# Altium PCB Avalon_ctrlunit.PcbDoc (part 3 of 6)
Units mil, origin at the board's own origin, x right, y up, seen from the top; angles counter-clockwise.
Board outline 3947.62 x 3160.22 mil, 4 copper layers (Top Layer, Mid-Layer 1, Mid-Layer 2, Bottom Layer); 194 components, 260 nets, 936 pads, 465 vias.
Unrouted connection lines stored in the file: 1.
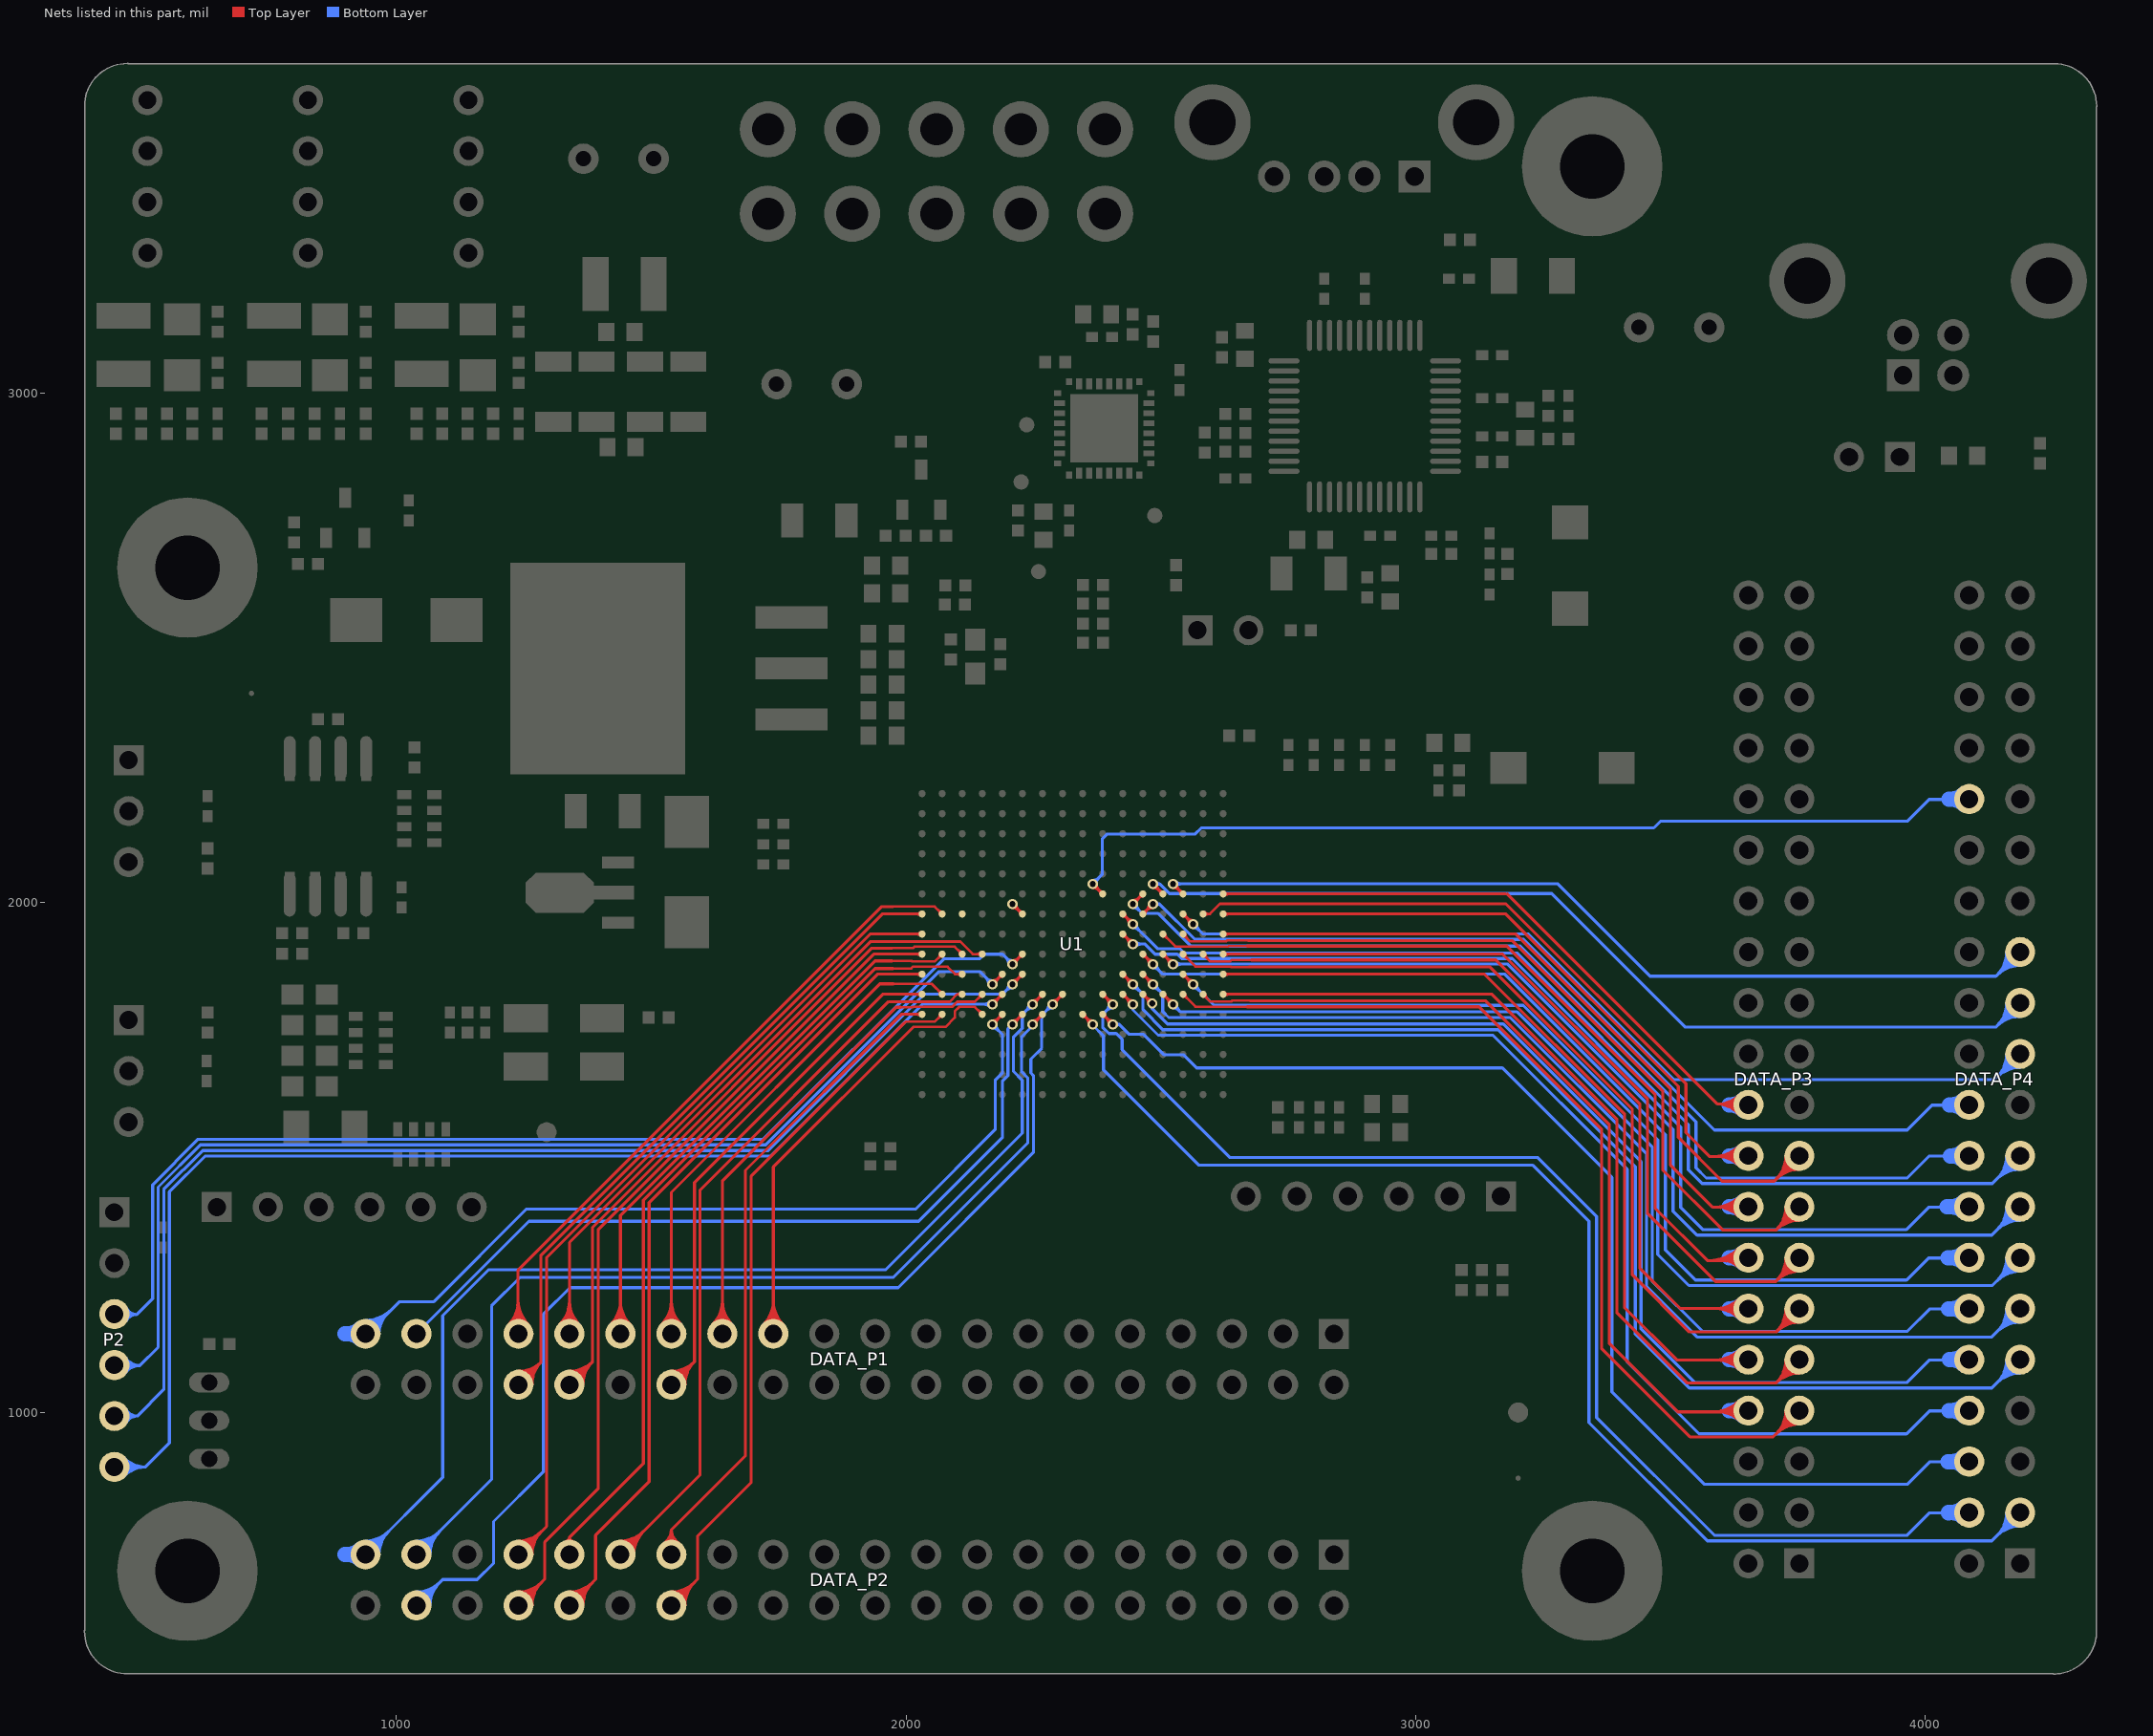
[diagram p5: the nets of this part, all layers, seen from the top]

## Via types
v1: diameter 20, hole 12, Top Layer to Bottom Layer, tented both sides, 334 vias
v2: diameter 32, hole 18, Top Layer to Bottom Layer, tented both sides, 84 vias
v3: diameter 50, hole 28, Top Layer to Bottom Layer, 32 vias
v4: diameter 25.98, hole 12.99, Top Layer to Bottom Layer, tented both sides, 9 vias
v5: diameter 50, hole 28, Top Layer to Bottom Layer, tented both sides, 6 vias

## Nets (pads, with @x,y where several pads share a name; then routed paths per layer and width w, separated by ;. In a path a pad name is that pad's centre, name@x,y a point inside that pad or via, vN(x,y) a via of type N, cw(c..) or ccw(c..) an arc to the next point about the centre after c; other vN are vias at no path point) (continued)
FPGA_E7: DATA_P4.6 U1.E7 | length 2459.6
  Top Layer w6: U1.E7@2386.06,1777.2 cw(c2386.06,1767.55) 2392.88,1774.38 cw(c2399.71,1781.2) U1.E7@2390.06,1781.2 ; U1.E7@2386.06,1781.2 v1(2405.74,1761.52) ; v1@2398.74,1761.52 ccw(c2381.84,1761.52) 2393.79,1773.47 ccw(c2405.74,1785.42) v1@2405.74,1768.52
  Bottom Layer w6: v1(2405.74,1761.52) 2418.48,1761.52 ; v1@2411.65,1757.77 cw(c2418.48,1753.43) 2418.48,1761.52 ; v1@2411.65,1765.27 ccw(c2418.48,1769.61) 2418.48,1761.52 ; 4044,903 4008,903 3964,859 3566.56,859 3385,1040.56 3385,1461 3170,1676 2570,1676 2544,1702 2506,1702 2466,1742 2438,1742 2418.48,1761.52
  Bottom Layer w30: 4044,903 4044.54,903.54 DATA_P4.6@4085.86,903.54 ; DATA_P4.6@4075.59,893.27 ccw(c4050.79,868.47) 4050.79,903.54 ccw(c4050.79,938.62) DATA_P4.6@4075.59,913.82
FPGA_E8: DATA_P4.3 U1.E8 | length 2836.6
  Top Layer w6: U1.E8@2346.68,1777.2 cw(c2346.68,1767.55) 2353.51,1774.38 cw(c2360.34,1781.2) U1.E8@2350.68,1781.2 ; U1.E8@2346.68,1781.2 v1(2366.37,1761.52) ; v1@2359.37,1761.52 ccw(c2342.47,1761.52) 2354.42,1773.47 ccw(c2366.37,1785.42) v1@2366.37,1768.52
  Bottom Layer w6: v1(2366.37,1761.52) 2366.37,1759.88 2387.74,1738.51 2387.69,1738.45 2387.69,1672.31 2575,1485 3230,1485 3340,1375 3340,980 3572,748 4130.31,748 DATA_P4.3@4185.86,803.54 ; DATA_P4.3@4159.33,803.54 cw(c4095.29,803.54) 4140.57,758.26 cw(c4185.86,712.97) DATA_P4.3@4185.86,777.02 ; DATA_P4.3@4165.33,803.54 cw(c4115.77,803.54) 4150.82,768.5 cw(c4185.86,733.46) DATA_P4.3@4185.86,783.02 ; DATA_P4.3@4171.33,803.54 cw(c4136.26,803.54) 4161.06,778.74 cw(c4185.86,753.94) DATA_P4.3@4185.86,789.02
FPGA_E10: DATA_P2.37 U1.E10 | length 2282.6
  Top Layer w6: v1(2248.26,1761.52) U1.E10@2267.94,1781.2 ; v1@2248.26,1768.52 ccw(c2248.26,1785.42) 2260.21,1773.47 ccw(c2272.16,1761.52) v1@2255.26,1761.52 ; U1.E10@2263.94,1781.2 cw(c2254.29,1781.2) 2261.12,1774.38 cw(c2267.94,1767.55) U1.E10@2267.94,1777.2
  Bottom Layer w6: DATA_P2.37@1039.76,721.29 1187,868.53 1187,1209 1243,1265 1975,1265 2239,1529 2239,1656.56 2227,1668.56 2227,1737.44 2248.26,1758.7 v1(2248.26,1761.52) ; DATA_P2.37@1039.76,735.82 ccw(c1039.76,770.89) 1064.56,746.09 ccw(c1089.36,721.29) DATA_P2.37@1054.29,721.29 ; DATA_P2.37@1039.76,741.82 ccw(c1039.76,791.38) 1074.81,756.33 ccw(c1109.85,721.29) DATA_P2.37@1060.29,721.29 ; DATA_P2.37@1039.76,747.82 ccw(c1039.76,811.86) 1085.05,766.58 ccw(c1130.33,721.29) DATA_P2.37@1066.29,721.29
FPGA_E11: DATA_P1.37 U1.E11 | length 1608.9
  Top Layer w6: v1(2208.89,1761.52) U1.E11@2228.57,1781.2 ; v1@2208.89,1768.52 ccw(c2208.89,1785.42) 2220.84,1773.47 ccw(c2232.79,1761.52) v1@2215.89,1761.52 ; U1.E11@2224.57,1781.2 cw(c2214.92,1781.2) 2221.75,1774.38 cw(c2228.57,1767.55) U1.E11@2228.57,1777.2
  Bottom Layer w6: DATA_P1.37@1039.76,1154.36 1260.4,1375 2025,1375 2189,1539 2189,1650 2200,1661 2200,1752.63 v1(2208.89,1761.52)
FPGA_E12: DATA_P1.39 U1.E12 | length 2025.3
  Top Layer w6: v1(2169.52,1761.52) U1.E12@2189.2,1781.2 ; v1@2169.52,1768.52 ccw(c2169.52,1785.42) 2181.47,1773.47 ccw(c2193.42,1761.52) v1@2176.52,1761.52 ; U1.E12@2185.2,1781.2 cw(c2175.55,1781.2) 2182.38,1774.38 cw(c2189.2,1767.55) U1.E12@2189.2,1777.2
  Bottom Layer w6: DATA_P1.39@939.76,1168.89 ccw(c939.76,1212.65) 970.71,1181.71 ; DATA_P1.39@939.76,1174.89 ccw(c939.76,1233.13) 980.95,1191.95 ; DATA_P1.39@939.76,1180.89 ccw(c939.76,1253.62) 991.19,1202.19 ; DATA_P1.39@941.56,1152.56 1006,1217 1073,1217 1255,1399 2019,1399 2175,1555 2175,1651.56 2189,1665.56 2189,1742.04 v1(2169.52,1761.52) ; DATA_P1.39@960.29,1154.36 cw(c1001.16,1154.36) 972.26,1183.26 ; DATA_P1.39@966.29,1154.36 cw(c1021.65,1154.36) 982.5,1193.5 ; v1@2169.52,1754.52 cw(c2169.52,1737.62) 2181.47,1749.57 cw(c2193.42,1761.52) v1@2176.52,1761.52
  Bottom Layer w30: 899,1154.36 DATA_P1.39@939.76,1154.36 ; DATA_P1.39@929.49,1144.09 ccw(c904.69,1119.29) 904.69,1154.36 ccw(c904.69,1189.43) DATA_P1.39@929.49,1164.63
FPGA_E13: DATA_P1.23 U1.E13 | length 1131.3
  Top Layer w5: 2013,1755 2014.33,1756.33 2077.33,1756.33 2095.96,1774.96 2095.96,1787.21 2104.46,1795.7 2135.33,1795.7 U1.E13@2149.83,1781.2 ; U1.E13@2145.33,1781.2 ccw(c2134.47,1781.2) 2142.15,1788.89 ccw(c2149.83,1796.57) U1.E13@2149.83,1785.7
  Top Layer w6: DATA_P1.23@1721.01,1173.12 ccw(c1675.72,1218.41) 1739.76,1218.41 ccw(c1803.81,1218.41) DATA_P1.23@1758.52,1173.12 ; DATA_P1.23@1725.25,1168.88 ccw(c1690.21,1203.92) 1739.76,1203.92 ccw(c1789.32,1203.92) DATA_P1.23@1754.28,1168.88 ; DATA_P1.23@1729.49,1164.63 ccw(c1704.69,1189.43) 1739.76,1189.43 ccw(c1774.84,1189.43) DATA_P1.23@1750.04,1164.63 ; DATA_P1.23@1739.76,1154.36 1739.76,1481.76 2013,1755
FPGA_E15: DATA_P2.28 U1.E15 | length 1663.9
  Top Layer w5: 1997,1764 1999.7,1766.7 2056.59,1766.7 U1.E15@2071.09,1781.2 ; U1.E15@2066.59,1781.2 cw(c2055.73,1781.2) 2063.41,1773.52 cw(c2071.09,1765.84) U1.E15@2071.09,1776.7
  Top Layer w6: DATA_P2.28@1539.76,621.29 1591,672.53 1591,757 1696,862 1696,1463 1997,1764 ; DATA_P2.28@1539.76,635.82 ccw(c1539.76,670.89) 1564.56,646.09 ccw(c1589.36,621.29) DATA_P2.28@1554.29,621.29 ; DATA_P2.28@1539.76,641.82 ccw(c1539.76,691.38) 1574.81,656.33 ccw(c1609.85,621.29) DATA_P2.28@1560.29,621.29 ; DATA_P2.28@1539.76,647.82 ccw(c1539.76,711.86) 1585.05,666.58 ccw(c1630.33,621.29) DATA_P2.28@1566.29,621.29
FPGA_E16: DATA_P2.27 U1.E16 | length 1412.8
  Top Layer w6: DATA_P2.27@1525.46,743.64 ccw(c1508.75,769.76) 1539.76,769.76 ; DATA_P2.27@1528.7,738.58 ccw(c1515.76,758.8) 1539.76,758.8 ccw(c1563.77,758.8) DATA_P2.27@1550.83,738.58 ; DATA_P2.27@1539.76,721.29 1539.76,769.76 ; DATA_P2.27@1554.06,743.64 cw(c1570.78,769.76) 1539.76,769.76 ; U1.E16@2028.9,1778.38 ccw(c2022.07,1771.55) 2022.07,1781.2 ccw(c2022.07,1790.86) U1.E16@2028.9,1784.03 ; U1.E16@2031.72,1781.2 1991.2,1781.2 1685,1475 1685,915 1539.76,769.76
FPGA_F1: DATA_P3.9 U1.F1 | length 1936.5
  Top Layer w6: U1.F1@2622.28,1820.57 3149.43,1820.57 3395,1575 3395,1195 3532,1058 3707.24,1058 DATA_P3.9@3752.79,1103.54 ; U1.F1@2625.1,1817.75 cw(c2631.93,1810.92) 2631.93,1820.57 cw(c2631.93,1830.23) U1.F1@2625.1,1823.4 ; DATA_P3.9@3726.26,1103.54 cw(c3662.22,1103.54) 3707.5,1058.26 cw(c3752.79,1012.97) DATA_P3.9@3752.79,1077.02 ; DATA_P3.9@3732.26,1103.54 cw(c3682.7,1103.54) 3717.74,1068.5 cw(c3752.79,1033.46) DATA_P3.9@3752.79,1083.02 ; DATA_P3.9@3738.26,1103.54 cw(c3703.19,1103.54) 3727.99,1078.74 cw(c3752.79,1053.94) DATA_P3.9@3752.79,1089.02
FPGA_F2: DATA_P3.8 U1.F2 | length 1985.5
  Top Layer w5: U1.F2@2582.91,1816.07 cw(c2582.91,1805.21) 2590.59,1812.89 cw(c2598.27,1820.57) U1.F2@2587.41,1820.57 ; U1.F2@2582.91,1820.57 2597.41,1806.07 2638.07,1806.07 2640,1808 2675.22,1808
  Top Layer w6: 2675.22,1808 3136.78,1808 3380,1564.78 3380,1135 3514,1001 DATA_P3.8@3652.79,1001 ; 3582.6,1001 ccw(c3582.6,1073.73) DATA_P3.8@3634.03,1022.3 ; 3594.88,1001 cw(c3594.88,945.64) DATA_P3.8@3634.03,984.79 ; 3597.09,1001 ccw(c3597.09,1059.24) DATA_P3.8@3638.27,1018.06 ; 3609.37,1001 cw(c3609.37,960.13) DATA_P3.8@3638.27,989.03 ; 3611.57,1001 ccw(c3611.57,1044.76) DATA_P3.8@3642.51,1013.82
  Bottom Layer w30: 3615,1003.54 DATA_P3.8@3652.79,1003.54 ; DATA_P3.8@3642.51,993.27 ccw(c3617.71,968.47) 3617.71,1003.54 ccw(c3617.71,1038.62) DATA_P3.8@3642.51,1013.82
FPGA_F3: DATA_P3.7 U1.F3 | length 2092.9
  Top Layer w5: U1.F3@2543.54,1816.07 cw(c2543.54,1805.21) 2551.22,1812.89 cw(c2558.9,1820.57) U1.F3@2548.04,1820.57 ; U1.F3@2543.54,1820.57 2568.04,1796.07 2632.42,1796.07 2632.5,1796 2669,1796
  Top Layer w6: 2669,1796 3124,1796 3365,1555 3365,1125 3538,952 3701.24,952 DATA_P3.7@3752.79,1003.54 ; DATA_P3.7@3726.26,1003.54 cw(c3662.22,1003.54) 3707.5,958.26 cw(c3752.79,912.97) DATA_P3.7@3752.79,977.02 ; DATA_P3.7@3732.26,1003.54 cw(c3682.7,1003.54) 3717.74,968.5 cw(c3752.79,933.46) DATA_P3.7@3752.79,983.02 ; DATA_P3.7@3738.26,1003.54 cw(c3703.19,1003.54) 3727.99,978.74 cw(c3752.79,953.94) DATA_P3.7@3752.79,989.02
FPGA_F4: DATA_P4.12 U1.F4 | length 2150.8
  Top Layer w6: U1.F4@2504.17,1816.57 cw(c2504.17,1806.92) 2510.99,1813.75 cw(c2517.82,1820.57) U1.F4@2508.17,1820.57 ; U1.F4@2504.17,1820.57 v1(2523.85,1800.89) ; v1@2516.85,1800.89 ccw(c2499.95,1800.89) 2511.9,1812.84 ccw(c2523.85,1824.79) v1@2523.85,1807.89
  Bottom Layer w6: v1@2523.85,1793.89 cw(c2523.85,1776.99) 2535.8,1788.94 cw(c2547.75,1800.89) v1@2530.85,1800.89 ; v1(2523.85,1800.89) 2538.74,1786 3199,1786 3464,1521 3464,1258 3563,1159 3964,1159 4008,1203 4045,1203
  Bottom Layer w30: 4045.54,1203.54 DATA_P4.12@4085.86,1203.54 ; DATA_P4.12@4075.59,1193.27 ccw(c4050.79,1168.47) 4050.79,1203.54 ccw(c4050.79,1238.62) DATA_P4.12@4075.59,1213.82
FPGA_F5: DATA_P4.10 U1.F5 | length 2253.4
  Top Layer w6: U1.F5@2463.28,1822.09 U1.F5@2464.8,1820.57 v1(2482.96,1802.41) v1@2484.79,1800.58 ; U1.F5@2464.8,1816.57 cw(c2464.8,1806.92) 2471.62,1813.75 cw(c2478.45,1820.57) U1.F5@2468.8,1820.57 ; v1@2475.96,1802.41 ccw(c2459.06,1802.41) 2471.01,1814.36 ccw(c2482.96,1826.31) v1@2482.96,1809.41
  Bottom Layer w6: v1@2480.35,1795.91 cw(c2478.78,1792.04) 2482.96,1792.04 ; v1(2482.96,1802.41) 2482.96,1792.04 ; v1@2485.58,1795.91 ccw(c2487.14,1792.04) 2482.96,1792.04 ; 4036,1103 4008,1103 3964,1059 3547,1059 3442,1164 3442,1492 3171.85,1762.15 2512.85,1762.15 2482.96,1792.04
  Bottom Layer w30: 4047,1104 DATA_P4.10@4085.86,1103.54 ; DATA_P4.10@4075.47,1093.39 ccw(c4050.38,1068.89) 4050.79,1103.96 ccw(c4051.2,1139.03) DATA_P4.10@4075.71,1113.94
FPGA_F6: DATA_P4.8 U1.F6 | length 2375.5
  Top Layer w6: U1.F6@2425.43,1816.57 cw(c2425.43,1806.92) 2432.25,1813.75 cw(c2439.08,1820.57) U1.F6@2429.43,1820.57 ; U1.F6@2425.43,1820.57 v1(2445.11,1800.89) v1@2446.94,1799.06 ; v1@2438.11,1800.89 ccw(c2421.21,1800.89) 2433.16,1812.84 ccw(c2445.11,1824.79) v1@2445.11,1807.89
  Bottom Layer w6: v1@2442.15,1794.55 cw(c2439.97,1789.89) 2445.11,1789.89 ; v1(2445.11,1800.89) 2445.11,1789.89 ; v1@2448.07,1794.55 ccw(c2450.25,1789.89) 2445.11,1789.89 ; 4046,1003 4008,1003 3963,958 3556,958 3415,1099 3415,1477 3151.85,1740.15 2494.85,1740.15 2445.11,1789.89
  Bottom Layer w30: 4046,1003 4046.54,1003.54 DATA_P4.8@4085.86,1003.54 ; DATA_P4.8@4075.59,993.27 ccw(c4050.79,968.47) 4050.79,1003.54 ccw(c4050.79,1038.62) DATA_P4.8@4075.59,1013.82
FPGA_F7: DATA_P4.4 U1.F7 | length 2578.4
  Top Layer w6: U1.F7@2386.06,1816.57 cw(c2386.06,1806.92) 2392.88,1813.75 cw(c2399.71,1820.57) U1.F7@2390.06,1820.57 ; U1.F7@2386.06,1820.57 v1(2405.74,1800.89) ; v1@2398.74,1800.89 ccw(c2381.84,1800.89) 2393.79,1812.84 ccw(c2405.74,1824.79) v1@2405.74,1807.89
  Bottom Layer w6: v1@2398.74,1800.89 cw(c2381.84,1800.89) 2393.79,1788.94 cw(c2405.74,1776.99) v1@2405.74,1793.89 ; v1(2405.74,1800.89) 2386,1781.15 2386,1755.8 2398.28,1743.52 2412.48,1743.52 2424,1732 2424,1712 2636,1500 3239.44,1500 3355,1384.44 3355,990 3586,759 3964,759 4008,803 4045,803
  Bottom Layer w30: 4045,803 4045.54,803.54 DATA_P4.4@4085.86,803.54 ; DATA_P4.4@4075.59,793.27 ccw(c4050.79,768.47) 4050.79,803.54 ccw(c4050.79,838.62) DATA_P4.4@4075.59,813.82
FPGA_F9: DATA_P2.38 U1.F9 | length 2444
  Top Layer w6: v1(2287.63,1800.89) U1.F9@2307.32,1820.57 ; v1@2287.63,1807.89 ccw(c2287.63,1824.79) 2299.58,1812.84 ccw(c2311.53,1800.89) v1@2294.63,1800.89 ; U1.F9@2303.32,1820.57 cw(c2293.66,1820.57) 2300.49,1813.75 cw(c2307.32,1806.92) U1.F9@2307.32,1816.57
  Bottom Layer w6: DATA_P2.38@1039.76,630 1049,630 1091,672 1159,672 1191,704 1191,786 1289,884 1289,1193 1341,1245 1985,1245 2250,1510 2250,1661.11 2245,1666.11 2245,1693.43 2266.26,1714.69 2266.26,1779.52 v1(2287.63,1800.89) ; DATA_P2.38@1039.76,635.82 ccw(c1039.76,672.16) 1065.46,646.46 ; DATA_P2.38@1039.76,641.82 ccw(c1039.76,692.65) 1075.71,656.71 ; DATA_P2.38@1039.76,647.82 ccw(c1039.76,713.14) 1085.95,666.95 ; DATA_P2.38@1054.29,621.29 cw(c1088.09,621.29) 1064.19,645.19 ; DATA_P2.38@1060.29,621.29 cw(c1108.58,621.29) 1074.43,655.43 ; DATA_P2.38@1066.29,621.29 cw(c1129.06,621.29) 1084.68,665.68 ; v1@2280.63,1800.89 cw(c2263.73,1800.89) 2275.68,1788.94 cw(c2287.63,1776.99) v1@2287.63,1793.89
FPGA_F10: DATA_P2.39 U1.F10 | length 2517.5
  Top Layer w6: v1(2248.26,1800.89) U1.F10@2267.94,1820.57 ; v1@2248.26,1807.89 ccw(c2248.26,1824.79) 2260.21,1812.84 ccw(c2272.16,1800.89) v1@2255.26,1800.89 ; U1.F10@2263.94,1820.57 cw(c2254.29,1820.57) 2261.12,1813.75 cw(c2267.94,1806.92) U1.F10@2267.94,1816.57
  Bottom Layer w6: DATA_P2.39@939.76,721.29 1091,872.53 1091,1190.04 1180.96,1280 1960,1280 2228,1548 2228,1652 2211,1669 2211,1737 2228,1754 2228,1780.63 v1(2248.26,1800.89) ; DATA_P2.39@939.76,735.82 ccw(c939.76,770.89) 964.56,746.09 ccw(c989.36,721.29) DATA_P2.39@954.29,721.29 ; DATA_P2.39@939.76,741.82 ccw(c939.76,791.38) 974.81,756.33 ccw(c1009.85,721.29) DATA_P2.39@960.29,721.29 ; DATA_P2.39@939.76,747.82 ccw(c939.76,811.86) 985.05,766.58 ccw(c1030.33,721.29) DATA_P2.39@966.29,721.29 ; v1@2241.26,1800.89 cw(c2224.36,1800.89) 2236.31,1788.94 cw(c2248.26,1776.99) v1@2248.26,1793.89
  Bottom Layer w30: 899,721.29 DATA_P2.39@939.76,721.29 ; DATA_P2.39@929.49,711.02 ccw(c904.69,686.22) 904.69,721.29 ccw(c904.69,756.36) DATA_P2.39@929.49,731.56
FPGA_F12: P2.6 U1.F12 | length 2700.1
  Top Layer w6: v1(2169.52,1800.89) U1.F12@2189.2,1820.57 ; v1@2169.52,1807.89 ccw(c2169.52,1824.79) 2181.47,1812.84 ccw(c2193.42,1800.89) v1@2176.52,1800.89 ; U1.F12@2185.2,1820.57 cw(c2175.55,1820.57) 2182.38,1813.75 cw(c2189.2,1806.92) U1.F12@2189.2,1816.57
  Bottom Layer w6: P2.6@447,893 508,893 ; P2.6@457.63,883.09 cw(c480.4,861.86) 480.4,893 cw(c480.4,924.14) P2.6@457.63,902.91 ; P2.6@462.01,879 cw(c494.2,849) 494.2,893 cw(c494.2,937) P2.6@462.01,907 ; P2.6@466.4,874.91 cw(c508,836.13) 508,893 ; P2.6@466.4,911.09 ccw(c508,949.87) 508,893 ; v1@2164.57,1795.94 ccw(c2152.62,1783.99) 2152.62,1800.89 ccw(c2152.62,1817.79) v1@2164.57,1805.84 ; v1(2169.52,1800.89) 2032,1800.89 1734.11,1503 625,1503 555,1433 555,940 508,893
FPGA_F13: DATA_P1.25 U1.F13 | length 1212
  Top Layer w5: 1989,1795 2013,1795 2014,1796 2090.61,1796 2100.32,1805.7 2134.96,1805.7 U1.F13@2149.83,1820.57 ; U1.F13@2145.33,1820.57 cw(c2134.47,1820.57) 2142.15,1812.89 cw(c2149.83,1805.21) U1.F13@2149.83,1816.07
  Top Layer w6: DATA_P1.25@1621.01,1173.12 ccw(c1575.72,1218.41) 1639.76,1218.41 ccw(c1703.81,1218.41) DATA_P1.25@1658.52,1173.12 ; DATA_P1.25@1625.25,1168.88 ccw(c1590.21,1203.92) 1639.76,1203.92 ccw(c1689.32,1203.92) DATA_P1.25@1654.28,1168.88 ; DATA_P1.25@1629.49,1164.63 ccw(c1604.69,1189.43) 1639.76,1189.43 ccw(c1674.84,1189.43) DATA_P1.25@1650.04,1164.63 ; DATA_P1.25@1639.76,1154.36 1639.76,1453.76 1981,1795 1989,1795
FPGA_F14: DATA_P2.29 U1.F14 | length 1701.4
  Top Layer w5: 1975.07,1806 2086,1806 2100.57,1820.57 U1.F14@2110.46,1820.57 ; U1.F14@2107.07,1817.62 ccw(c2100.58,1811.96) 2100.58,1820.57 ccw(c2100.58,1829.19) U1.F14@2107.07,1823.53
  Top Layer w6: DATA_P2.29@1439.76,721.29 1596,877.53 1596,1436 1966,1806 1975.07,1806 ; DATA_P2.29@1439.76,735.82 ccw(c1439.76,770.89) 1464.56,746.09 ccw(c1489.36,721.29) DATA_P2.29@1454.29,721.29 ; DATA_P2.29@1439.76,741.82 ccw(c1439.76,791.38) 1474.81,756.33 ccw(c1509.85,721.29) DATA_P2.29@1460.29,721.29 ; DATA_P2.29@1439.76,747.82 ccw(c1439.76,811.86) 1485.05,766.58 ccw(c1530.33,721.29) DATA_P2.29@1466.29,721.29
FPGA_F15: DATA_P1.27 U1.F15 | length 1237.3
  Top Layer w5: 1975,1841 2050.67,1841 U1.F15@2071.09,1820.57 ; U1.F15@2066.59,1820.57 ccw(c2055.73,1820.57) 2063.41,1828.26 ccw(c2071.09,1835.94) U1.F15@2071.09,1825.07
  Top Layer w6: DATA_P1.27@1521.01,1173.12 ccw(c1475.72,1218.41) 1539.76,1218.41 ccw(c1603.81,1218.41) DATA_P1.27@1558.52,1173.12 ; DATA_P1.27@1525.25,1168.88 ccw(c1490.21,1203.92) 1539.76,1203.92 ccw(c1589.32,1203.92) DATA_P1.27@1554.28,1168.88 ; DATA_P1.27@1529.49,1164.63 ccw(c1504.69,1189.43) 1539.76,1189.43 ccw(c1574.84,1189.43) DATA_P1.27@1550.04,1164.63 ; DATA_P1.27@1539.76,1154.36 1539.76,1431.76 1949,1841 1975,1841
FPGA_F16: DATA_P1.28 U1.F16 | length 1263.5
  Top Layer w6: DATA_P1.28@1539.76,1054.36 1585,1099.6 ; DATA_P1.28@1539.78,1068.89 ccw(c1539.8,1103.87) 1564.54,1079.13 ccw(c1589.27,1054.4) DATA_P1.28@1554.29,1054.37 ; DATA_P1.28@1539.78,1074.89 ccw(c1539.82,1124.31) 1574.77,1089.37 ccw(c1609.71,1054.42) DATA_P1.28@1560.29,1054.38 ; DATA_P1.28@1539.79,1080.89 ccw(c1539.84,1144.76) 1585,1099.6 ; DATA_P1.28@1566.29,1054.38 cw(c1630.16,1054.43) 1585,1099.6 ; U1.F16@2028.9,1817.75 ccw(c2022.07,1810.92) 2022.07,1820.57 ccw(c2022.07,1830.23) U1.F16@2028.9,1823.4 ; U1.F16@2031.72,1820.57 1954.57,1820.57 1585,1451 1585,1099.6
FPGA_G1: DATA_P3.10 U1.G1 | length 1908.2
  Top Layer w6: U1.G1@2622.28,1859.94 3135.06,1859.94 3410,1585 3410,1205 3512,1103 DATA_P3.10@3652.79,1103 ; U1.G1@2625.1,1857.12 cw(c2631.93,1850.29) 2631.93,1859.94 cw(c2631.93,1869.6) U1.G1@2625.1,1862.77 ; 3587.43,1103 ccw(c3587.43,1168.9) DATA_P3.10@3634.03,1122.3 ; 3590.06,1103 cw(c3590.06,1040.81) DATA_P3.10@3634.03,1084.79 ; 3601.92,1103 ccw(c3601.92,1154.41) DATA_P3.10@3638.27,1118.06 ; 3604.54,1103 cw(c3604.54,1055.3) DATA_P3.10@3638.27,1089.03 ; 3616.4,1103 ccw(c3616.4,1139.93) DATA_P3.10@3642.51,1113.82 ; 3619.03,1103 cw(c3619.03,1069.78) DATA_P3.10@3642.51,1093.27
  Bottom Layer w30: 3615,1103.54 DATA_P3.10@3652.79,1103.54 ; DATA_P3.10@3642.51,1093.27 ccw(c3617.71,1068.47) 3617.71,1103.54 ccw(c3617.71,1138.62) DATA_P3.10@3642.51,1113.82
FPGA_G3: DATA_P4.13 U1.G3 | length 2351.6
  Top Layer w6: U1.G3@2543.54,1855.94 cw(c2543.54,1846.29) 2550.36,1853.12 cw(c2557.19,1859.94) U1.G3@2547.54,1859.94 ; U1.G3@2543.54,1859.94 v1(2563.22,1840.26) ; v1@2556.22,1840.26 ccw(c2539.32,1840.26) 2551.27,1852.21 ccw(c2563.22,1864.16) v1@2563.22,1847.26
  Bottom Layer w6: v1@2563.22,1833.26 cw(c2563.22,1816.36) 2575.17,1828.31 cw(c2587.12,1840.26) v1@2570.22,1840.26 ; v1(2563.22,1840.26) 2604.48,1799 3211,1799 3475,1535 3475,1310 3536,1249 4131.31,1249 DATA_P4.13@4185.86,1303.54 ; DATA_P4.13@4159.33,1303.54 cw(c4095.29,1303.54) 4140.57,1258.26 cw(c4185.86,1212.97) DATA_P4.13@4185.86,1277.02 ; DATA_P4.13@4165.33,1303.54 cw(c4115.77,1303.54) 4150.82,1268.5 cw(c4185.86,1233.46) DATA_P4.13@4185.86,1283.02 ; DATA_P4.13@4171.33,1303.54 cw(c4136.26,1303.54) 4161.06,1278.74 cw(c4185.86,1253.94) DATA_P4.13@4185.86,1289.02
FPGA_G5: DATA_P4.11 U1.G5 | length 2515.9
  Top Layer w6: U1.G5@2464.8,1855.94 cw(c2464.8,1846.29) 2471.62,1853.12 cw(c2478.45,1859.94) U1.G5@2468.8,1859.94 ; U1.G5@2464.8,1859.94 v1(2484.48,1840.26) v1@2486.31,1838.43 ; v1@2477.48,1840.26 ccw(c2460.58,1840.26) 2472.53,1852.21 ccw(c2484.48,1864.16) v1@2484.48,1847.26
  Bottom Layer w6: v1@2484.48,1833.26 cw(c2484.48,1816.36) 2496.43,1828.31 cw(c2508.38,1840.26) v1@2491.48,1840.26 ; v1(2484.48,1840.26) 2503.74,1821 2503.74,1786.82 2515.56,1775 3185.33,1775 3453,1507.33 3453,1247 3552,1148 4130.31,1148 DATA_P4.11@4185.86,1203.54 ; DATA_P4.11@4159.33,1203.54 cw(c4095.29,1203.54) 4140.57,1158.26 cw(c4185.86,1112.97) DATA_P4.11@4185.86,1177.02 ; DATA_P4.11@4165.33,1203.54 cw(c4115.77,1203.54) 4150.82,1168.5 cw(c4185.86,1133.46) DATA_P4.11@4185.86,1183.02 ; DATA_P4.11@4171.33,1203.54 cw(c4136.26,1203.54) 4161.06,1178.74 cw(c4185.86,1153.94) DATA_P4.11@4185.86,1189.02
FPGA_G6: DATA_P4.9 U1.G6 | length 2634.1
  Top Layer w6: U1.G6@2425.43,1855.94 cw(c2425.43,1846.29) 2432.25,1853.12 cw(c2439.08,1859.94) U1.G6@2429.43,1859.94 ; U1.G6@2425.43,1859.94 v1(2445.11,1840.26) v1@2446.94,1838.43 ; v1@2438.11,1840.26 ccw(c2421.21,1840.26) 2433.16,1852.21 ccw(c2445.11,1864.16) v1@2445.11,1847.26
  Bottom Layer w6: v1@2445.11,1833.26 cw(c2445.11,1816.36) 2457.06,1828.31 cw(c2469.01,1840.26) v1@2452.11,1840.26 ; v1(2445.11,1840.26) 2464.96,1820.41 2464.96,1790.04 2503.85,1751.15 3161.85,1751.15 3431,1482 3431,1154 3537,1048 4130.31,1048 DATA_P4.9@4185.86,1103.54 ; DATA_P4.9@4159.33,1103.54 cw(c4095.29,1103.54) 4140.57,1058.26 cw(c4185.86,1012.97) DATA_P4.9@4185.86,1077.02 ; DATA_P4.9@4165.33,1103.54 cw(c4115.77,1103.54) 4150.82,1068.5 cw(c4185.86,1033.46) DATA_P4.9@4185.86,1083.02 ; DATA_P4.9@4171.33,1103.54 cw(c4136.26,1103.54) 4161.06,1078.74 cw(c4185.86,1053.94) DATA_P4.9@4185.86,1089.02
FPGA_G11: P2.5 U1.G11 | length 2533
  Top Layer w6: v1(2208.89,1840.26) U1.G11@2228.57,1859.94 ; v1@2208.89,1847.26 ccw(c2208.89,1864.16) 2220.84,1852.21 ccw(c2232.79,1840.26) v1@2215.89,1840.26 ; U1.G11@2224.57,1859.94 cw(c2214.92,1859.94) 2221.75,1853.12 cw(c2228.57,1846.29) U1.G11@2228.57,1855.94
  Bottom Layer w6: P2.5@447,993 492,993 ; P2.5@464.96,983.06 cw(c481.82,973.73) 481.82,993 cw(c481.82,1012.27) P2.5@464.96,1002.94 ; P2.5@470.21,980.16 cw(c492,968.1) 492,993 ; P2.5@470.21,1005.84 ccw(c492,1017.9) 492,993 ; v1@2201.89,1840.26 cw(c2184.99,1840.26) 2196.94,1828.31 cw(c2208.89,1816.36) v1@2208.89,1833.26 ; v1(2208.89,1840.26) 2189.63,1821 2036.56,1821 1729.56,1514 620.44,1514 544,1437.56 544,1045 492,993
FPGA_G12: P2.4 U1.G12 | length 2449.3
  Top Layer w6: v1(2169.52,1840.26) U1.G12@2189.2,1859.94 ; v1@2169.52,1847.26 ccw(c2169.52,1864.16) 2181.47,1852.21 ccw(c2193.42,1840.26) v1@2176.52,1840.26 ; U1.G12@2185.2,1859.94 cw(c2175.55,1859.94) 2182.38,1853.12 cw(c2189.2,1846.29) U1.G12@2189.2,1855.94
  Bottom Layer w6: P2.4@448,1092 497,1092 ; P2.4@463.63,1080.96 cw(c485.25,1065.31) 485.25,1092 ; P2.4@464.35,1103.98 ccw(c486.1,1117.74) 486.1,1092 ; P2.4@468.49,1077.44 cw(c497,1056.8) 497,1092 ; P2.4@469.42,1107.19 ccw(c497,1124.64) 497,1092 ; v1@2162.52,1840.26 ccw(c2145.62,1840.26) 2157.57,1852.21 ccw(c2169.52,1864.16) v1@2169.52,1847.26 ; v1(2169.52,1840.26) 2144.78,1865 2065,1865 1725,1525 615.89,1525 533,1442.11 533,1128 497,1092
FPGA_G14: DATA_P2.31 U1.G14 | length 1614.6
  Top Layer w5: 1974,1871 2010,1871 2013.44,1874.44 2081.56,1874.44 2096.06,1859.94 U1.G14@2110.46,1859.94 ; U1.G14@2107.28,1856.76 ccw(c2099.6,1849.08) 2099.6,1859.94 ccw(c2099.6,1870.81) U1.G14@2107.28,1863.13
  Top Layer w6: DATA_P2.31@1333.7,747.12 ccw(c1331.91,754.76) 1339.76,754.76 ; DATA_P2.31@1339.76,721.29 1339.76,754.76 ; DATA_P2.31@1345.82,747.12 cw(c1347.62,754.76) 1339.76,754.76 ; 1974,1871 1939.65,1871 1485,1416.35 1485,900 1339.76,754.76
FPGA_G16: DATA_P2.32 U1.G16 | length 1825.3
  Top Layer w6: DATA_P2.32@1339.76,621.29 1391,672.53 1391,759 1496,864 1496,1411.8 1944.15,1859.94 U1.G16@2031.72,1859.94 ; DATA_P2.32@1339.76,635.82 ccw(c1339.76,670.89) 1364.56,646.09 ccw(c1389.36,621.29) DATA_P2.32@1354.29,621.29 ; DATA_P2.32@1339.76,641.82 ccw(c1339.76,691.38) 1374.81,656.33 ccw(c1409.85,621.29) DATA_P2.32@1360.29,621.29 ; DATA_P2.32@1339.76,647.82 ccw(c1339.76,711.86) 1385.05,666.58 ccw(c1430.33,621.29) DATA_P2.32@1366.29,621.29 ; U1.G16@2028.9,1857.12 ccw(c2022.07,1850.29) 2022.07,1859.94 ccw(c2022.07,1869.6) U1.G16@2028.9,1862.77
FPGA_H1: DATA_P3.13 U1.H1 | length 1796.4
  Top Layer w6: U1.H1@2622.28,1899.32 3170.68,1899.32 3455,1615 3455,1390 3588,1257 3706.24,1257 DATA_P3.13@3752.79,1303.54 ; U1.H1@2625.1,1896.49 cw(c2631.93,1889.66) 2631.93,1899.32 cw(c2631.93,1908.97) U1.H1@2625.1,1902.14 ; DATA_P3.13@3726.26,1303.54 cw(c3662.22,1303.54) 3707.5,1258.26 cw(c3752.79,1212.97) DATA_P3.13@3752.79,1277.02 ; DATA_P3.13@3732.26,1303.54 cw(c3682.7,1303.54) 3717.74,1268.5 cw(c3752.79,1233.46) DATA_P3.13@3752.79,1283.02 ; DATA_P3.13@3738.26,1303.54 cw(c3703.19,1303.54) 3727.99,1278.74 cw(c3752.79,1253.94) DATA_P3.13@3752.79,1289.02
FPGA_H2: DATA_P3.12 U1.H2 | length 1892.9
  Top Layer w5: U1.H2@2582.91,1894.82 cw(c2582.91,1883.95) 2590.59,1891.63 cw(c2598.27,1899.32) U1.H2@2587.41,1899.32 ; U1.H2@2582.91,1899.32 2597.41,1884.82 2635.82,1884.82 2639,1888 2678,1888
  Top Layer w6: 2678,1888 3157,1888 3440,1605 3440,1282.56 3518.56,1204 DATA_P3.12@3652.79,1204 ; 3587.64,1204 cw(c3587.64,1138.4) DATA_P3.12@3634.03,1184.79 ; 3589.85,1204 ccw(c3589.85,1266.48) DATA_P3.12@3634.03,1222.3 ; 3602.13,1204 cw(c3602.13,1152.88) DATA_P3.12@3638.27,1189.03 ; 3604.33,1204 ccw(c3604.33,1252) DATA_P3.12@3638.27,1218.06 ; 3616.61,1204 cw(c3616.61,1167.37) DATA_P3.12@3642.51,1193.27 ; 3618.82,1204 ccw(c3618.82,1237.51) DATA_P3.12@3642.51,1213.82
  Bottom Layer w30: 3615,1203.54 DATA_P3.12@3652.79,1203.54 ; DATA_P3.12@3642.51,1193.27 ccw(c3617.71,1168.47) 3617.71,1203.54 ccw(c3617.71,1238.62) DATA_P3.12@3642.51,1213.82
FPGA_H3: DATA_P3.11 U1.H3 | length 1976.2
  Top Layer w5: U1.H3@2543.54,1894.82 cw(c2543.54,1883.95) 2551.22,1891.63 cw(c2558.9,1899.32) U1.H3@2548.04,1899.32 ; U1.H3@2543.54,1899.32 2568.04,1874.82 2637.18,1874.82 2638,1874 2673,1874
  Top Layer w6: 2673,1874 3146,1874 3425,1595 3425,1270 3537,1158 3707.24,1158 DATA_P3.11@3752.79,1203.54 ; DATA_P3.11@3726.26,1203.54 cw(c3662.22,1203.54) 3707.5,1158.26 cw(c3752.79,1112.97) DATA_P3.11@3752.79,1177.02 ; DATA_P3.11@3732.26,1203.54 cw(c3682.7,1203.54) 3717.74,1168.5 cw(c3752.79,1133.46) DATA_P3.11@3752.79,1183.02 ; DATA_P3.11@3738.26,1203.54 cw(c3703.19,1203.54) 3727.99,1178.74 cw(c3752.79,1153.94) DATA_P3.11@3752.79,1189.02
FPGA_H4: DATA_P4.15 U1.H4 | length 2328.6
  Top Layer w6: U1.H4@2504.17,1895.32 cw(c2504.17,1885.66) 2510.99,1892.49 cw(c2517.82,1899.32) U1.H4@2508.17,1899.32 ; U1.H4@2504.17,1899.32 v1(2523.85,1879.63) ; v1@2516.85,1879.63 ccw(c2499.95,1879.63) 2511.9,1891.58 ccw(c2523.85,1903.53) v1@2523.85,1886.63
  Bottom Layer w6: v1(2523.85,1879.63) 3180.37,1879.63 3505,1555 3505,1395 3552,1348 4130.31,1348 DATA_P4.15@4185.86,1403.54 ; v1@2528.8,1874.68 cw(c2540.75,1862.73) 2540.75,1879.63 cw(c2540.75,1896.53) v1@2528.8,1884.58 ; DATA_P4.15@4159.33,1403.54 cw(c4095.29,1403.54) 4140.57,1358.26 cw(c4185.86,1312.97) DATA_P4.15@4185.86,1377.02 ; DATA_P4.15@4165.33,1403.54 cw(c4115.77,1403.54) 4150.82,1368.5 cw(c4185.86,1333.46) DATA_P4.15@4185.86,1383.02 ; DATA_P4.15@4171.33,1403.54 cw(c4136.26,1403.54) 4161.06,1378.74 cw(c4185.86,1353.94) DATA_P4.15@4185.86,1389.02
FPGA_H5: DATA_P4.14 U1.H5 | length 2158.9
  Top Layer w6: U1.H5@2464.8,1895.32 cw(c2464.8,1885.66) 2471.62,1892.49 cw(c2478.45,1899.32) U1.H5@2468.8,1899.32 ; U1.H5@2464.8,1899.32 v1(2484.48,1879.63) ; v1@2477.48,1879.63 ccw(c2460.58,1879.63) 2472.53,1891.58 ccw(c2484.48,1903.53) v1@2484.48,1886.63
  Bottom Layer w6: v1@2484.48,1872.63 cw(c2484.48,1855.73) 2496.43,1867.68 cw(c2508.38,1879.63) v1@2491.48,1879.63 ; v1(2484.48,1879.63) 2504.11,1860 3175,1860 3490,1545 3490,1319 3549,1260 3963,1260 4006,1303 4044,1303
  Bottom Layer w30: 4044.54,1303.54 DATA_P4.14@4085.86,1303.54 ; DATA_P4.14@4075.59,1293.27 ccw(c4050.79,1268.47) 4050.79,1303.54 ccw(c4050.79,1338.62) DATA_P4.14@4075.59,1313.82
FPGA_H11: P2.3 U1.H11 | length 2378.3
  Top Layer w6: v1(2208.89,1879.63) U1.H11@2228.57,1899.32 ; v1@2208.89,1886.63 ccw(c2208.89,1903.53) 2220.84,1891.58 ccw(c2232.79,1879.63) v1@2215.89,1879.63 ; U1.H11@2224.57,1899.32 cw(c2214.92,1899.32) 2221.75,1892.49 cw(c2228.57,1885.66) U1.H11@2228.57,1895.32
  Bottom Layer w6: P2.3@448,1192 491,1192 ; P2.3@464.82,1182.81 cw(c480.66,1173.76) 480.66,1192 ; P2.3@465.46,1201.98 ccw(c481.41,1209.73) 481.41,1192 ; P2.3@470.03,1179.83 cw(c491,1167.85) 491,1192 ; P2.3@470.86,1204.6 ccw(c491,1214.4) 491,1192 ; v1@2201.89,1879.63 ccw(c2184.99,1879.63) 2196.94,1891.58 ccw(c2208.89,1903.53) v1@2208.89,1886.63 ; v1(2208.89,1879.63) 2189.52,1899 2153,1899 2144,1890 2074.44,1890 1720.44,1536 611.33,1536 522,1446.67 522,1223 491,1192
FPGA_H13: DATA_P1.31 U1.H13 | length 1496.8
  Top Layer w5: 1973.18,1923.82 2106.47,1923.82 2130.97,1899.32 U1.H13@2149.83,1899.32 ; U1.H13@2146.65,1896.13 ccw(c2138.97,1888.45) 2138.97,1899.32 ccw(c2138.97,1910.18) U1.H13@2146.65,1902.5
  Top Layer w6: DATA_P1.31@1321.01,1173.12 ccw(c1275.15,1218.98) 1340,1218.98 ; DATA_P1.31@1325.25,1168.88 ccw(c1289.64,1204.49) 1340,1204.49 ; DATA_P1.31@1329.49,1164.63 ccw(c1304.12,1190) 1340,1190 ; 1340,1188.86 ccw(c1374.27,1188.86) DATA_P1.31@1350.04,1164.63 ; 1340,1203.35 ccw(c1388.75,1203.35) DATA_P1.31@1354.28,1168.88 ; 1340,1217.84 ccw(c1403.24,1217.84) DATA_P1.31@1358.52,1173.12 ; DATA_P1.31@1346,1154.36 1340,1160.36 1340,1333.58 1930.24,1923.82 1973.18,1923.82
FPGA_H14: DATA_P1.32 U1.H14 | length 1537.2
  Top Layer w5: 1973,1911 2014,1911 2016.82,1913.82 2095.96,1913.82 U1.H14@2110.46,1899.32 ; U1.H14@2105.96,1899.32 ccw(c2095.1,1899.32) 2102.78,1907 ccw(c2110.46,1914.68) U1.H14@2110.46,1903.82
  Top Layer w6: DATA_P1.32@1339.76,1054.36 1385,1099.6 ; DATA_P1.32@1339.78,1068.89 ccw(c1339.8,1103.87) 1364.54,1079.13 ccw(c1389.27,1054.4) DATA_P1.32@1354.29,1054.37 ; DATA_P1.32@1339.78,1074.89 ccw(c1339.82,1124.31) 1374.77,1089.37 ccw(c1409.71,1054.42) DATA_P1.32@1360.29,1054.38 ; DATA_P1.32@1339.79,1080.89 ccw(c1339.84,1144.76) 1385,1099.6 ; DATA_P1.32@1366.29,1054.38 cw(c1430.16,1054.43) 1385,1099.6 ; 1973,1911 1932.98,1911 1385,1363.02 1385,1099.6
FPGA_H15: DATA_P1.29 U1.H15 | length 1327.6
  Top Layer w5: 1973,1886 2011,1886 2012.18,1884.82 2056.59,1884.82 U1.H15@2071.09,1899.32 ; U1.H15@2066.59,1899.32 cw(c2055.73,1899.32) 2063.41,1891.63 cw(c2071.09,1883.95) U1.H15@2071.09,1894.82
  Top Layer w6: DATA_P1.29@1421.01,1173.12 ccw(c1375.72,1218.41) 1439.76,1218.41 ccw(c1503.81,1218.41) DATA_P1.29@1458.52,1173.12 ; DATA_P1.29@1425.25,1168.88 ccw(c1390.21,1203.92) 1439.76,1203.92 ccw(c1489.32,1203.92) DATA_P1.29@1454.28,1168.88 ; DATA_P1.29@1429.49,1164.63 ccw(c1404.69,1189.43) 1439.76,1189.43 ccw(c1474.84,1189.43) DATA_P1.29@1450.04,1164.63 ; DATA_P1.29@1439.76,1154.36 1439.76,1386.67 1939.09,1886 1973,1886
FPGA_H16: DATA_P2.34 U1.H16 | length 1910.3
  Top Layer w6: DATA_P2.34@1239.76,621.29 1291,672.53 1291,745 1396,850 1396,1358.47 1936.85,1899.32 U1.H16@2031.72,1899.32 ; DATA_P2.34@1239.76,635.82 ccw(c1239.76,670.89) 1264.56,646.09 ccw(c1289.36,621.29) DATA_P2.34@1254.29,621.29 ; DATA_P2.34@1239.76,641.82 ccw(c1239.76,691.38) 1274.81,656.33 ccw(c1309.85,621.29) DATA_P2.34@1260.29,621.29 ; DATA_P2.34@1239.76,647.82 ccw(c1239.76,711.86) 1285.05,666.58 ccw(c1330.33,621.29) DATA_P2.34@1266.29,621.29 ; U1.H16@2028.9,1896.49 ccw(c2022.07,1889.66) 2022.07,1899.32 ccw(c2022.07,1908.97) U1.H16@2028.9,1902.14
FPGA_J1: DATA_P3.16 U1.J1 | length 1681.9
  Top Layer w6: U1.J1@2622.28,1938.68 3196.32,1938.68 3500,1635 3500,1485 3582,1403 DATA_P3.16@3652.79,1403 ; U1.J1@2625.1,1935.86 cw(c2631.93,1929.03) 2631.93,1938.68 cw(c2631.93,1948.34) U1.J1@2625.1,1941.51 ; 3587.43,1403 ccw(c3587.43,1468.9) DATA_P3.16@3634.03,1422.3 ; 3590.06,1403 cw(c3590.06,1340.81) DATA_P3.16@3634.03,1384.79 ; 3601.92,1403 ccw(c3601.92,1454.41) DATA_P3.16@3638.27,1418.06 ; 3604.54,1403 cw(c3604.54,1355.3) DATA_P3.16@3638.27,1389.03 ; 3616.4,1403 ccw(c3616.4,1439.93) DATA_P3.16@3642.51,1413.82 ; 3619.03,1403 cw(c3619.03,1369.78) DATA_P3.16@3642.51,1393.27
  Bottom Layer w30: 3615,1403.54 DATA_P3.16@3652.79,1403.54 ; DATA_P3.16@3642.51,1393.27 ccw(c3617.71,1368.47) 3617.71,1403.54 ccw(c3617.71,1438.62) DATA_P3.16@3642.51,1413.82
FPGA_J3: DATA_P3.15 U1.J3 | length 1811.5
  Top Layer w5: U1.J3@2543.54,1934.18 cw(c2543.54,1923.32) 2551.22,1931 cw(c2558.9,1938.68) U1.J3@2548.04,1938.68 ; U1.J3@2543.54,1938.68 2558.04,1924.18 2628.28,1924.18 2630.1,1926 2671,1926
  Top Layer w6: 2671,1926 3189,1926 3485,1630 3485,1475 3602,1358 3707.24,1358 DATA_P3.15@3752.79,1403.54 ; DATA_P3.15@3726.26,1403.54 cw(c3662.22,1403.54) 3707.5,1358.26 cw(c3752.79,1312.97) DATA_P3.15@3752.79,1377.02 ; DATA_P3.15@3732.26,1403.54 cw(c3682.7,1403.54) 3717.74,1368.5 cw(c3752.79,1333.46) DATA_P3.15@3752.79,1383.02 ; DATA_P3.15@3738.26,1403.54 cw(c3703.19,1403.54) 3727.99,1378.74 cw(c3752.79,1353.94) DATA_P3.15@3752.79,1389.02
FPGA_J4: DATA_P3.14 U1.J4 | length 1907.7
  Top Layer w5: U1.J4@2504.17,1934.18 cw(c2504.17,1923.32) 2511.85,1931 cw(c2519.53,1938.68) U1.J4@2508.67,1938.68 ; U1.J4@2504.17,1938.68 2528.67,1914.18 2632.42,1914.18 2633.24,1915 2669,1915
  Top Layer w6: 2669,1915 3178.9,1915 3470,1623.9 3470,1400 3572,1298 DATA_P3.14@3652.79,1298 ; 3575.36,1298 ccw(c3575.36,1380.97) DATA_P3.14@3634.03,1322.3 ; 3589.85,1298 ccw(c3589.85,1366.48) DATA_P3.14@3638.27,1318.06 ; 3602.13,1298 cw(c3602.13,1252.88) DATA_P3.14@3634.03,1284.79 ; 3604.33,1298 ccw(c3604.33,1352) DATA_P3.14@3642.51,1313.82 ; 3616.61,1298 cw(c3616.61,1267.37) DATA_P3.14@3638.27,1289.03 ; 3618.82,1298 ccw(c3618.82,1337.51) DATA_P3.14@3646.76,1309.57
  Bottom Layer w30: 3615,1303.54 DATA_P3.14@3652.79,1303.54 ; DATA_P3.14@3642.51,1293.27 ccw(c3617.71,1268.47) 3617.71,1303.54 ccw(c3617.71,1338.62) DATA_P3.14@3642.51,1313.82
FPGA_J6: DATA_P4.16 U1.J6 | length 2134.1
  Top Layer w6: U1.J6@2425.43,1934.68 cw(c2425.43,1925.03) 2432.25,1931.86 cw(c2439.08,1938.68) U1.J6@2429.43,1938.68 ; U1.J6@2425.43,1938.68 v1(2445.11,1919) ; v1@2438.11,1919 ccw(c2421.21,1919) 2433.16,1930.95 ccw(c2445.11,1942.9) v1@2445.11,1926
  Bottom Layer w6: v1(2445.11,1919) 2468.92,1919 2488.92,1899 2532.44,1899 2540.81,1890.63 3189.37,1890.63 3520,1560 3520,1402 3563,1359 3963,1359 4007,1403 4042,1403 ; v1@2450.06,1914.05 cw(c2462.01,1902.1) 2462.01,1919 cw(c2462.01,1935.9) v1@2450.06,1923.95
  Bottom Layer w30: 4042.54,1403.54 DATA_P4.16@4085.86,1403.54 ; DATA_P4.16@4075.59,1393.27 ccw(c4050.79,1368.47) 4050.79,1403.54 ccw(c4050.79,1438.62) DATA_P4.16@4075.59,1413.82
FPGA_J16: DATA_P2.33 U1.J16 | length 1854
  Top Layer w6: DATA_P2.33@1239.76,721.29 1295,776.53 1295,1304.14 1929.55,1938.68 U1.J16@2031.72,1938.68 ; DATA_P2.33@1239.76,735.82 ccw(c1239.76,770.89) 1264.56,746.09 ccw(c1289.36,721.29) DATA_P2.33@1254.29,721.29 ; DATA_P2.33@1239.76,741.82 ccw(c1239.76,791.38) 1274.81,756.33 ccw(c1309.85,721.29) DATA_P2.33@1260.29,721.29 ; DATA_P2.33@1239.76,747.82 ccw(c1239.76,811.86) 1285.05,766.58 ccw(c1330.33,721.29) DATA_P2.33@1266.29,721.29 ; U1.J16@2028.9,1935.86 ccw(c2022.07,1929.03) 2022.07,1938.68 ccw(c2022.07,1948.34) U1.J16@2028.9,1941.51
FPGA_K1: DATA_P3.17 U1.K1 | length 1675.4
  Top Layer w6: U1.K1@2622.28,1978.06 3176.94,1978.06 3515,1640 3515,1540 3601,1454 3703.24,1454 DATA_P3.17@3752.79,1503.54 ; U1.K1@2625.1,1975.23 cw(c2631.93,1968.4) 2631.93,1978.06 cw(c2631.93,1987.71) U1.K1@2625.1,1980.88 ; DATA_P3.17@3726.26,1503.54 cw(c3662.22,1503.54) 3707.5,1458.26 cw(c3752.79,1412.97) DATA_P3.17@3752.79,1477.02 ; DATA_P3.17@3732.26,1503.54 cw(c3682.7,1503.54) 3717.74,1468.5 cw(c3752.79,1433.46) DATA_P3.17@3752.79,1483.02 ; DATA_P3.17@3738.26,1503.54 cw(c3703.19,1503.54) 3727.99,1478.74 cw(c3752.79,1453.94) DATA_P3.17@3752.79,1489.02
FPGA_K2: DATA_P3.18 U1.K2 | length 1683.3
  Top Layer w5: U1.K2@2582.91,1978.06 2596.06,1978.06 2616,1998 2669,1998 ; U1.K2@2586.09,1974.87 cw(c2593.77,1967.19) 2593.77,1978.06 cw(c2593.77,1988.92) U1.K2@2586.09,1981.24
  Top Layer w6: 2669,1998 3177,1998 3530,1645 3530,1549 3577,1502 DATA_P3.18@3652.79,1502 ; 3585.02,1502 ccw(c3585.02,1571.31) DATA_P3.18@3634.03,1522.3 ; 3592.47,1502 cw(c3592.47,1443.23) DATA_P3.18@3634.03,1484.79 ; 3599.5,1502 ccw(c3599.5,1556.83) DATA_P3.18@3638.27,1518.06 ; 3606.96,1502 cw(c3606.96,1457.71) DATA_P3.18@3638.27,1489.03 ; 3613.99,1502 ccw(c3613.99,1542.34) DATA_P3.18@3642.51,1513.82 ; 3621.44,1502 cw(c3621.44,1472.2) DATA_P3.18@3642.51,1493.27
  Bottom Layer w30: 3615,1503.54 DATA_P3.18@3652.79,1503.54 ; DATA_P3.18@3642.51,1493.27 ccw(c3617.71,1468.47) 3617.71,1503.54 ccw(c3617.71,1538.62) DATA_P3.18@3642.51,1513.82
FPGA_K3: DATA_P4.21 U1.K3 | length 2099.7
  Top Layer w6: U1.K3@2543.54,1974.06 cw(c2543.54,1964.4) 2550.36,1971.23 cw(c2557.19,1978.06) U1.K3@2547.54,1978.06 ; U1.K3@2543.54,1978.06 v1(2563.22,1958.37) ; v1@2556.22,1958.37 ccw(c2539.32,1958.37) 2551.27,1970.32 ccw(c2563.22,1982.27) v1@2563.22,1965.37
  Bottom Layer w6: v1@2563.22,1951.37 cw(c2563.22,1934.47) 2575.17,1946.42 cw(c2587.12,1958.37) v1@2570.22,1958.37 ; v1(2563.22,1958.37) 2582.59,1939 3221,1939 3507,1653 4135.31,1653 DATA_P4.21@4185.86,1703.54 ; DATA_P4.21@4159.33,1703.54 cw(c4095.29,1703.54) 4140.57,1658.26 cw(c4185.86,1612.97) DATA_P4.21@4185.86,1677.02 ; DATA_P4.21@4165.33,1703.54 cw(c4115.77,1703.54) 4150.82,1668.5 cw(c4185.86,1633.46) DATA_P4.21@4185.86,1683.02 ; DATA_P4.21@4171.33,1703.54 cw(c4136.26,1703.54) 4161.06,1678.74 cw(c4185.86,1653.94) DATA_P4.21@4185.86,1689.02
FPGA_K5: DATA_P4.20 U1.K5 | length 1946.7
  Top Layer w6: U1.K5@2464.8,1978.06 v1(2484.48,1997.74) ; U1.K5@2464.8,1982.06 ccw(c2464.8,1991.71) 2471.62,1984.88 ccw(c2478.45,1978.06) U1.K5@2468.8,1978.06 ; v1@2477.48,1997.74 cw(c2460.58,1997.74) 2472.53,1985.79 cw(c2484.48,1973.84) v1@2484.48,1990.74
  Bottom Layer w6: v1(2484.48,1997.74) 2497.26,1997.74 ; v1@2490.38,1993.97 cw(c2497.26,1989.58) 2497.26,1997.74 ; v1@2490.38,2001.51 ccw(c2497.26,2005.9) 2497.26,1997.74 ; 4047,1603 4013,1603 3964,1554 3586,1554 3212,1928 2567,1928 2497.26,1997.74
  Bottom Layer w30: 4047,1603 4047.54,1603.54 DATA_P4.20@4085.86,1603.54 ; DATA_P4.20@4075.59,1593.27 ccw(c4050.79,1568.47) 4050.79,1603.54 ccw(c4050.79,1638.62) DATA_P4.20@4075.59,1613.82
FPGA_K6: DATA_P4.17 U1.K6 | length 2356.1
  Top Layer w6: U1.K6@2425.43,1974.06 cw(c2425.43,1964.4) 2432.25,1971.23 cw(c2439.08,1978.06) U1.K6@2429.43,1978.06 ; U1.K6@2425.43,1978.06 v1(2445.11,1958.37) ; v1@2438.11,1958.37 ccw(c2421.21,1958.37) 2433.16,1970.32 ccw(c2445.11,1982.27) v1@2445.11,1965.37
  Bottom Layer w6: v1@2445.11,1951.37 cw(c2445.11,1934.47) 2457.06,1946.42 cw(c2469.01,1958.37) v1@2452.11,1958.37 ; v1(2445.11,1958.37) 2493.48,1910 2537,1910 2545.37,1901.63 3198.37,1901.63 3535,1565 3535,1476 3562,1449 4131.31,1449 DATA_P4.17@4185.86,1503.54 ; DATA_P4.17@4159.33,1503.54 cw(c4095.29,1503.54) 4140.57,1458.26 cw(c4185.86,1412.97) DATA_P4.17@4185.86,1477.02 ; DATA_P4.17@4165.33,1503.54 cw(c4115.77,1503.54) 4150.82,1468.5 cw(c4185.86,1433.46) DATA_P4.17@4185.86,1483.02 ; DATA_P4.17@4171.33,1503.54 cw(c4136.26,1503.54) 4161.06,1478.74 cw(c4185.86,1453.94) DATA_P4.17@4185.86,1489.02
FPGA_K11: U1.K11 | length 69.6
  Top Layer w6: v1@2208.89,1990.74 cw(c2208.89,1973.84) 2220.84,1985.79 cw(c2232.79,1997.74) v1@2215.89,1997.74 ; v1(2208.89,1997.74) U1.K11@2228.57,1978.06 ; U1.K11@2224.57,1978.06 ccw(c2214.92,1978.06) 2221.75,1984.88 ccw(c2228.57,1991.71) U1.K11@2228.57,1982.06
FPGA_K14: U1.K14
FPGA_K15: DATA_P1.33 U1.K15 | length 1509
  Top Layer w5: 1974,1992.56 2056.59,1992.56 U1.K15@2071.09,1978.06 ; U1.K15@2066.59,1978.06 ccw(c2055.73,1978.06) 2063.41,1985.74 ccw(c2071.09,1993.42) U1.K15@2071.09,1982.56
  Top Layer w6: DATA_P1.33@1221.01,1173.12 ccw(c1177.56,1216.56) 1239,1216.56 ; DATA_P1.33@1225.25,1168.88 ccw(c1192.05,1202.08) 1239,1202.08 ; DATA_P1.33@1229.49,1164.63 ccw(c1206.54,1187.59) 1239,1187.59 ; DATA_P1.33@1239,1154.36 1239,1279.25 1952.31,1992.56 1974,1992.56 ; 1239,1191.28 ccw(c1276.68,1191.28) DATA_P1.33@1250.04,1164.63 ; 1239,1205.76 ccw(c1291.17,1205.76) DATA_P1.33@1254.28,1168.88 ; 1239,1220.25 ccw(c1305.65,1220.25) DATA_P1.33@1258.52,1173.12
FPGA_K16: DATA_P1.34 U1.K16 | length 1538.1
  Top Layer w6: DATA_P1.34@1239.76,1054.36 1284,1098.6 ; DATA_P1.34@1240.01,1068.89 ccw(c1240.56,1102.01) 1263.99,1078.59 ccw(c1287.41,1055.16) DATA_P1.34@1254.29,1054.61 ; DATA_P1.34@1240.11,1074.89 ccw(c1240.89,1121.69) 1273.99,1088.59 ccw(c1307.09,1055.49) DATA_P1.34@1260.29,1054.71 ; DATA_P1.34@1240.21,1080.89 ccw(c1241.22,1141.37) 1284,1098.6 ; DATA_P1.34@1266.29,1054.81 cw(c1326.77,1055.82) 1284,1098.6 ; U1.K16@2028.9,1975.23 ccw(c2022.07,1968.4) 2022.07,1978.06 ccw(c2022.07,1987.71) U1.K16@2028.9,1980.88 ; U1.K16@2031.72,1978.06 1953.36,1978.06 1284,1308.69 1284,1098.6
FPGA_L1: DATA_P3.20 U1.L1 | length 1519.9
  Top Layer w6: U1.L1@2622.28,2017.43 3176.46,2017.43 ; U1.L1@2625.1,2014.6 cw(c2631.93,2007.77) 2631.93,2017.43 cw(c2631.93,2027.08) U1.L1@2625.1,2020.25 ; 3179.84,2017.43 3592.26,1605 ; 3605.24,1605 cw(c3605.24,1563.12) DATA_P3.20@3637.15,1590.25 ; 3606.75,1605 ccw(c3606.75,1649.58) DATA_P3.20@3638.27,1618.06 ; 3618.22,1605 cw(c3618.22,1574.15) DATA_P3.20@3641.72,1594.13 ; 3621.23,1605 ccw(c3621.23,1635.1) DATA_P3.20@3642.51,1613.82 ; DATA_P3.20@3632.58,1586.36 ccw(c3592.26,1552.09) 3592.26,1605 ; DATA_P3.20@3634.03,1622.3 cw(c3592.26,1664.07) 3592.26,1605 ; DATA_P3.20@3652.79,1605 3592.26,1605
  Bottom Layer w30: 3615,1603.54 DATA_P3.20@3652.79,1603.54 ; DATA_P3.20@3642.51,1593.27 ccw(c3617.71,1568.47) 3617.71,1603.54 ccw(c3617.71,1638.62) DATA_P3.20@3642.51,1613.82
FPGA_L3: DATA_P4.25 U1.L3 | length 2086.4
  Top Layer w6: v1@2523.85,2030.11 cw(c2523.85,2013.21) 2535.8,2025.16 cw(c2547.75,2037.11) v1@2530.85,2037.11 ; v1(2523.85,2037.11) U1.L3@2543.54,2017.43 ; U1.L3@2539.54,2017.43 ccw(c2529.88,2017.43) 2536.71,2024.25 ccw(c2543.54,2031.08) U1.L3@2543.54,2021.43
  Bottom Layer w6: v1(2523.85,2037.11) 3278.89,2037.11 3460,1856 4138.31,1856 DATA_P4.25@4185.86,1903.54 ; v1@2528.8,2032.16 cw(c2540.75,2020.21) 2540.75,2037.11 cw(c2540.75,2054.01) v1@2528.8,2042.06 ; DATA_P4.25@4159.33,1903.54 cw(c4095.29,1903.54) 4140.57,1858.26 cw(c4185.86,1812.97) DATA_P4.25@4185.86,1877.02 ; DATA_P4.25@4165.33,1903.54 cw(c4115.77,1903.54) 4150.82,1868.5 cw(c4185.86,1833.46) DATA_P4.25@4185.86,1883.02 ; DATA_P4.25@4171.33,1903.54 cw(c4136.26,1903.54) 4161.06,1878.74 cw(c4185.86,1853.94) DATA_P4.25@4185.86,1889.02
FPGA_L4: DATA_P4.23 U1.L4 | length 2158.5
  Top Layer w6: v1@2484.48,2030.11 cw(c2484.48,2013.21) 2496.43,2025.16 cw(c2508.38,2037.11) v1@2491.48,2037.11 ; v1(2484.48,2037.11) U1.L4@2504.17,2017.43 ; U1.L4@2500.17,2017.43 ccw(c2490.51,2017.43) 2497.34,2024.25 ccw(c2504.17,2031.08) U1.L4@2504.17,2021.43
  Bottom Layer w6: v1(2484.48,2037.11) 2497.89,2037.11 ; v1@2490.22,2033.11 cw(c2497.89,2027.77) 2497.89,2037.11 ; v1@2490.22,2041.11 ccw(c2497.89,2046.45) 2497.89,2037.11 ; 4140.04,1758.04 cw(c4185.86,1712.21) DATA_P4.23@4185.86,1777.02 ; 4140.8,1758.8 ccw(c4096.05,1803.54) DATA_P4.23@4159.33,1803.54 ; 4150.28,1768.28 cw(c4185.86,1732.7) DATA_P4.23@4185.86,1783.02 ; 4151.04,1769.04 ccw(c4116.53,1803.54) DATA_P4.23@4165.33,1803.54 ; 4160.52,1778.52 cw(c4185.86,1753.18) DATA_P4.23@4185.86,1789.02 ; 4161.28,1779.28 ccw(c4137.02,1803.54) DATA_P4.23@4171.33,1803.54 ; DATA_P4.23@4185.7,1803.7 4138,1756 3529,1756 3267,2018 2517,2018 2497.89,2037.11
FPGA_L5: DATA_P4.18 U1.L5 | length 2085.4
  Top Layer w6: v1(2445.11,1997.74) U1.L5@2464.8,2017.43 ; v1@2445.11,2004.74 ccw(c2445.11,2021.64) 2457.06,2009.69 ccw(c2469.01,1997.74) v1@2452.11,1997.74 ; U1.L5@2460.8,2017.43 cw(c2451.14,2017.43) 2457.97,2010.6 cw(c2464.8,2003.77) U1.L5@2464.8,2013.43
  Bottom Layer w6: v1@2445.11,1990.74 cw(c2445.11,1973.84) 2457.06,1985.79 cw(c2469.01,1997.74) v1@2452.11,1997.74 ; v1(2445.11,1997.74) 2463.85,1979 2495,1979 2559,1915 3205,1915 3550,1570 3550,1480 3570,1460 3964,1460 4007,1503 4049,1503
  Bottom Layer w30: 4049,1503 4049.54,1503.54 DATA_P4.18@4085.86,1503.54 ; DATA_P4.18@4075.59,1493.27 ccw(c4050.79,1468.47) 4050.79,1503.54 ccw(c4050.79,1538.62) DATA_P4.18@4075.59,1513.82
FPGA_L7: DATA_P4.32 U1.L7 | length 1980.2
  Top Layer w6: v1@2366.37,2030.11 cw(c2366.37,2013.21) 2378.32,2025.16 cw(c2390.27,2037.11) v1@2373.37,2037.11 ; v1(2366.37,2037.11) U1.L7@2386.06,2017.43 ; U1.L7@2382.06,2017.43 ccw(c2372.4,2017.43) 2379.23,2024.25 ccw(c2386.06,2031.08) U1.L7@2386.06,2021.43
  Bottom Layer w6: v1(2366.37,2037.11) 2385,2055.74 2385,2125 2395,2135 2567.44,2135 2579.44,2147 3467,2147 3480,2160 3964,2160 4007,2203 4046,2203 ; v1@2366.37,2044.11 ccw(c2366.37,2061.01) 2378.32,2049.06 ccw(c2390.27,2037.11) v1@2373.37,2037.11
  Bottom Layer w30: 4046,2203 4046.54,2203.54 DATA_P4.32@4085.86,2203.54 ; DATA_P4.32@4075.59,2193.27 ccw(c4050.79,2168.47) 4050.79,2203.54 ccw(c4050.79,2238.62) DATA_P4.32@4075.59,2213.82